# Altium PCB Controller-Board-Rev2_Panelized.PcbDoc (part 1 of 2)
Units mm, origin at the board's own origin, x right, y up, seen from the top; angles counter-clockwise.
Board outline 31 x 50 mm, 4 copper layers (Top Layer, Mid Layer 1, Mid Layer 2, Bottom Layer), stack 1.56 mm thick; 94 components, 55 nets, 446 pads, 226 vias.
Unrouted connection lines stored in the file: 54.
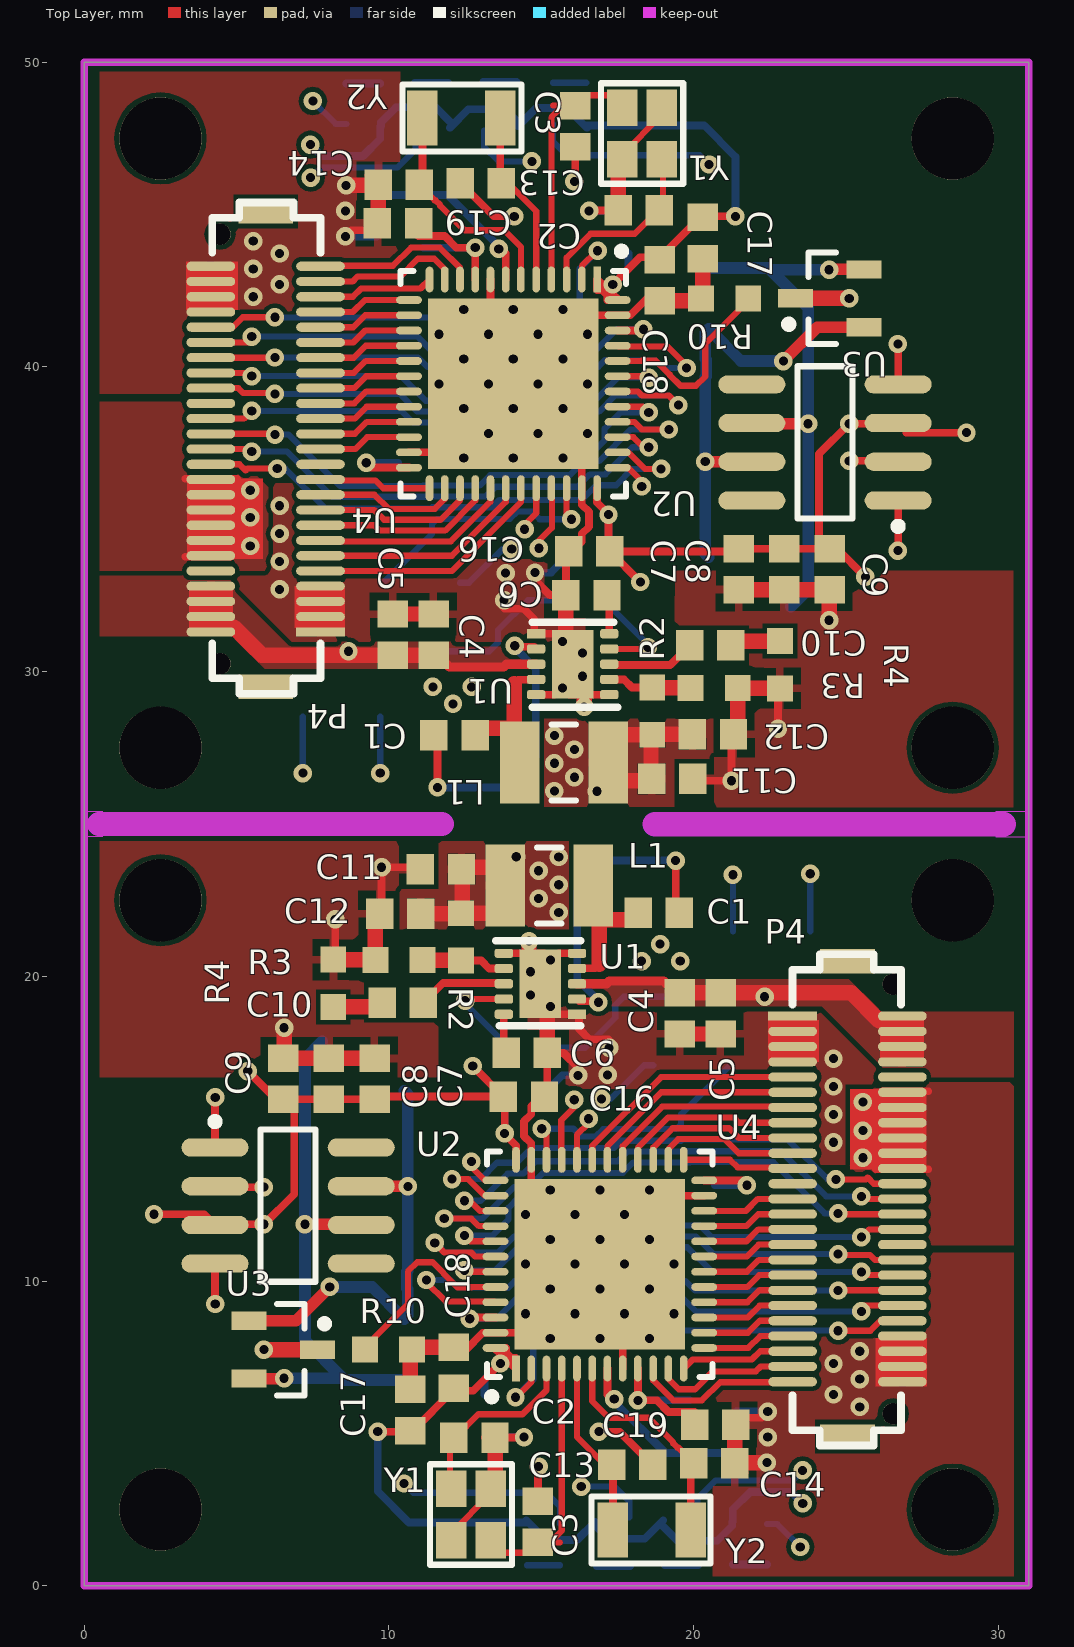
[diagram p0: Top Layer view]
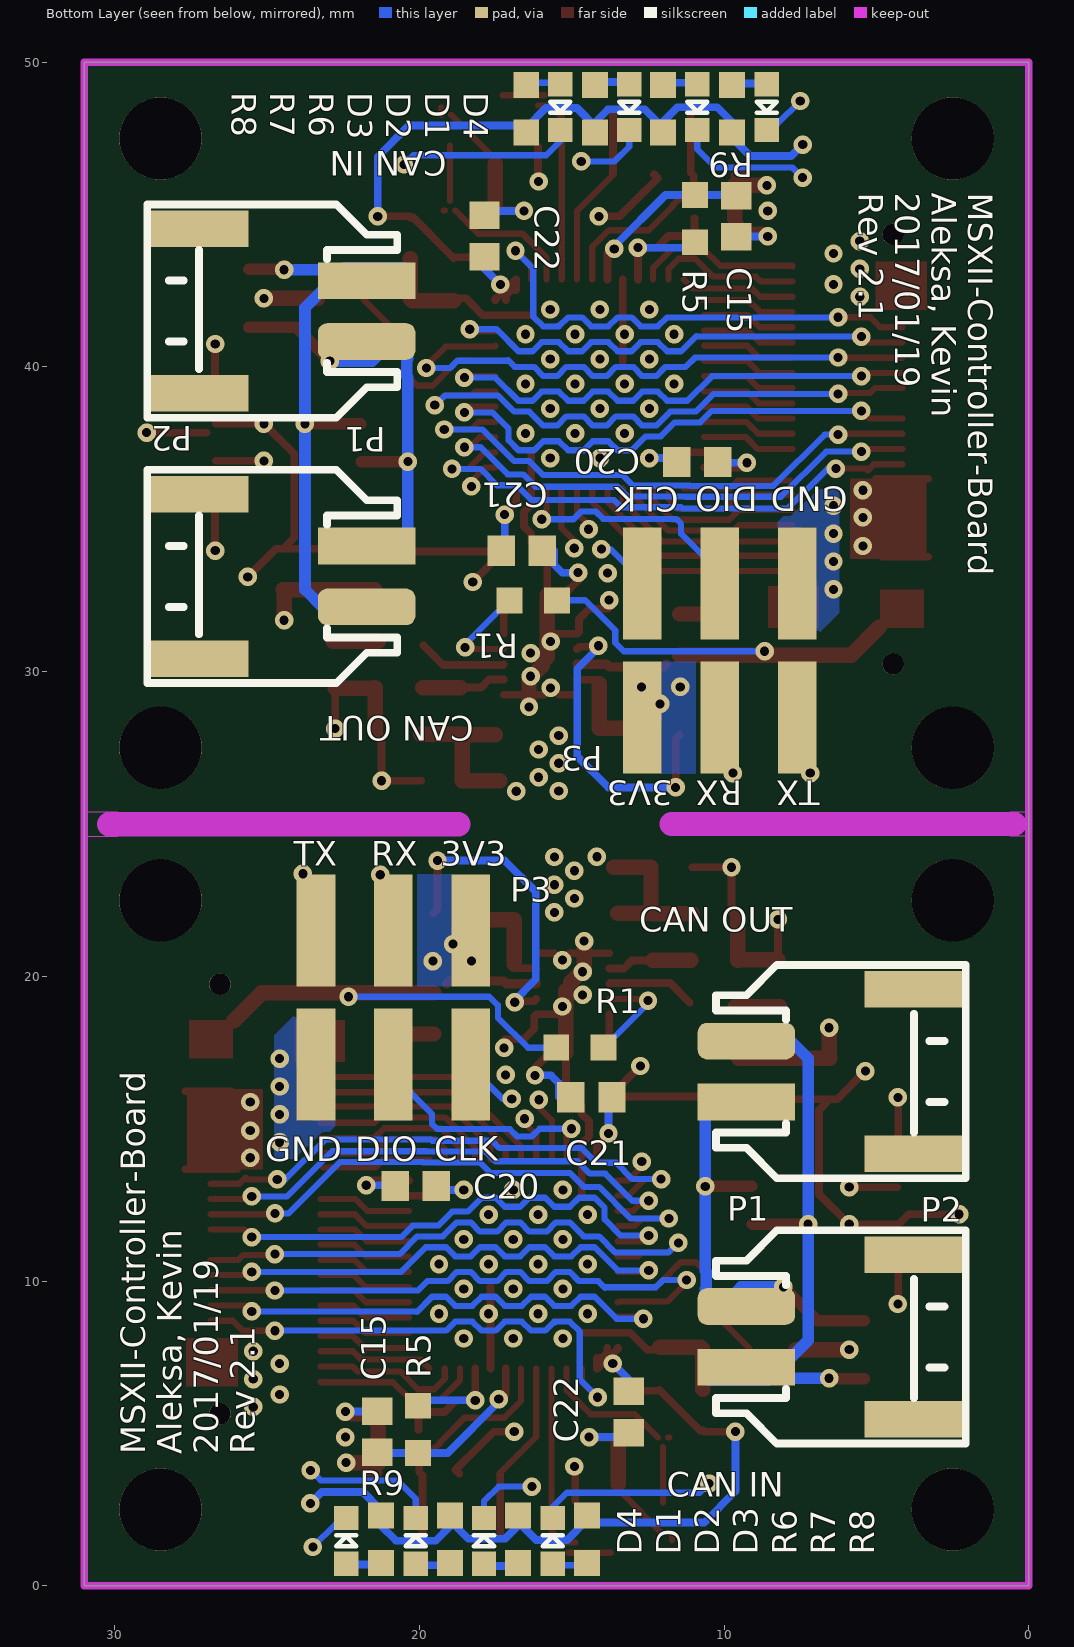
[diagram p1: Bottom Layer view, seen from below]
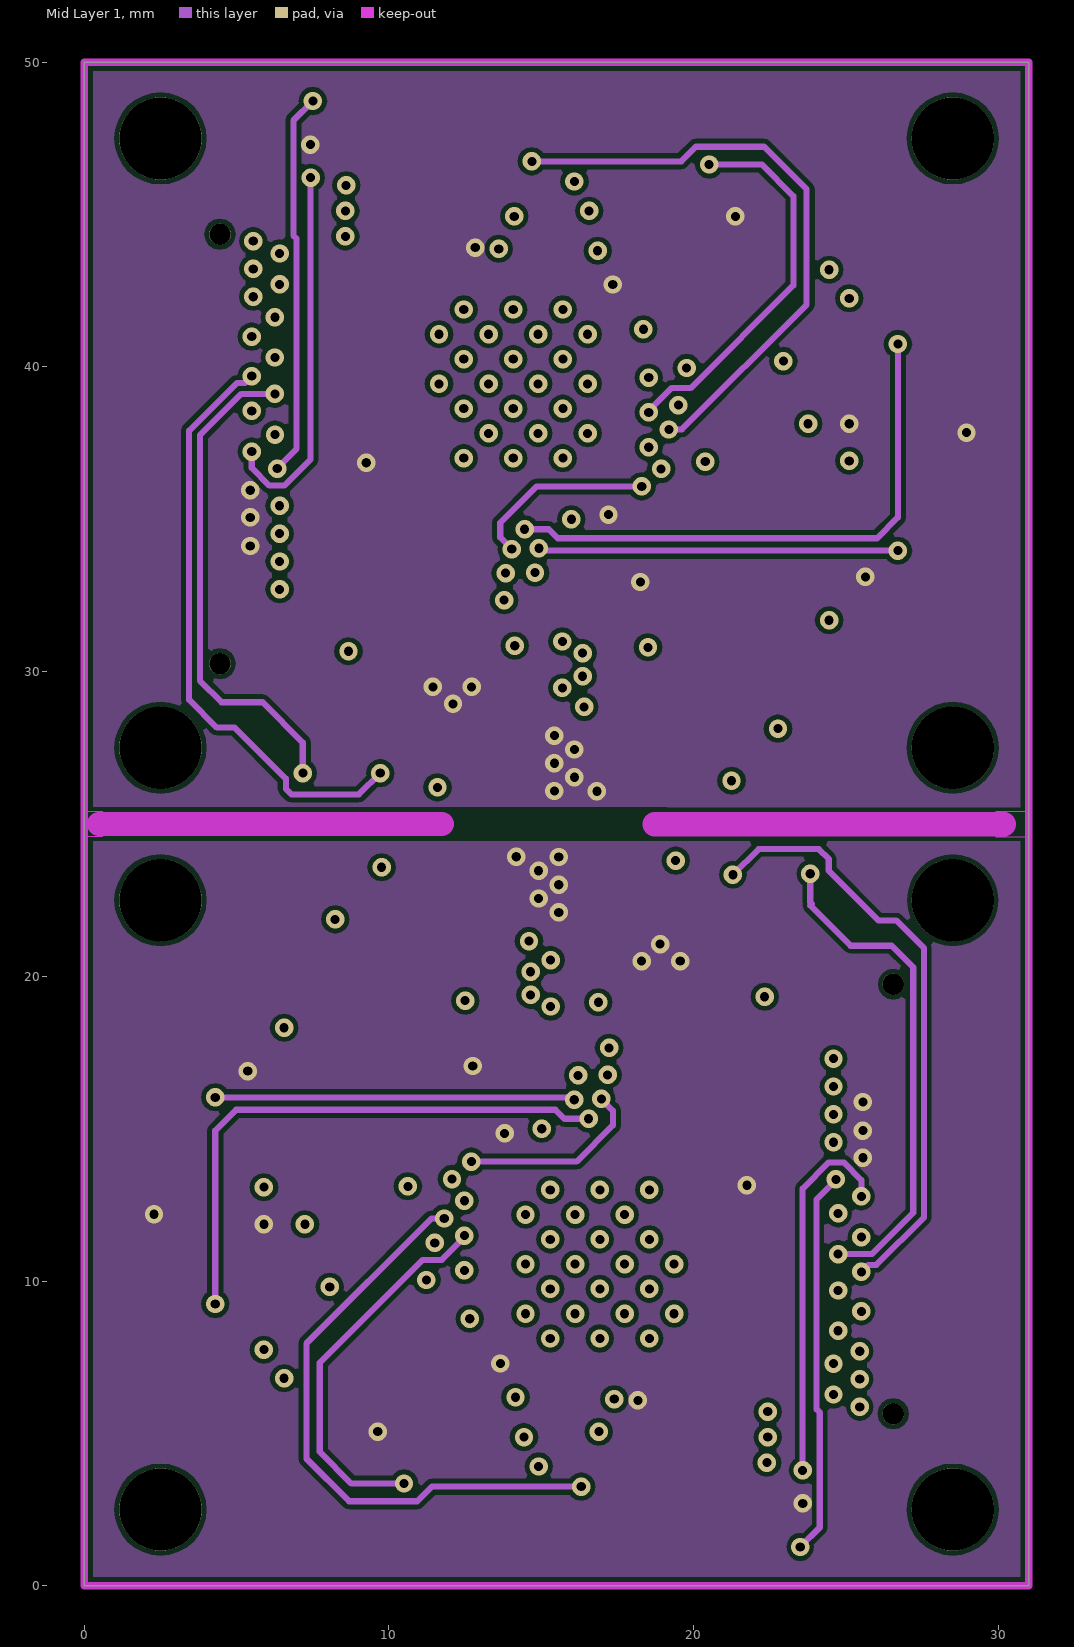
[diagram p2: Mid Layer 1]
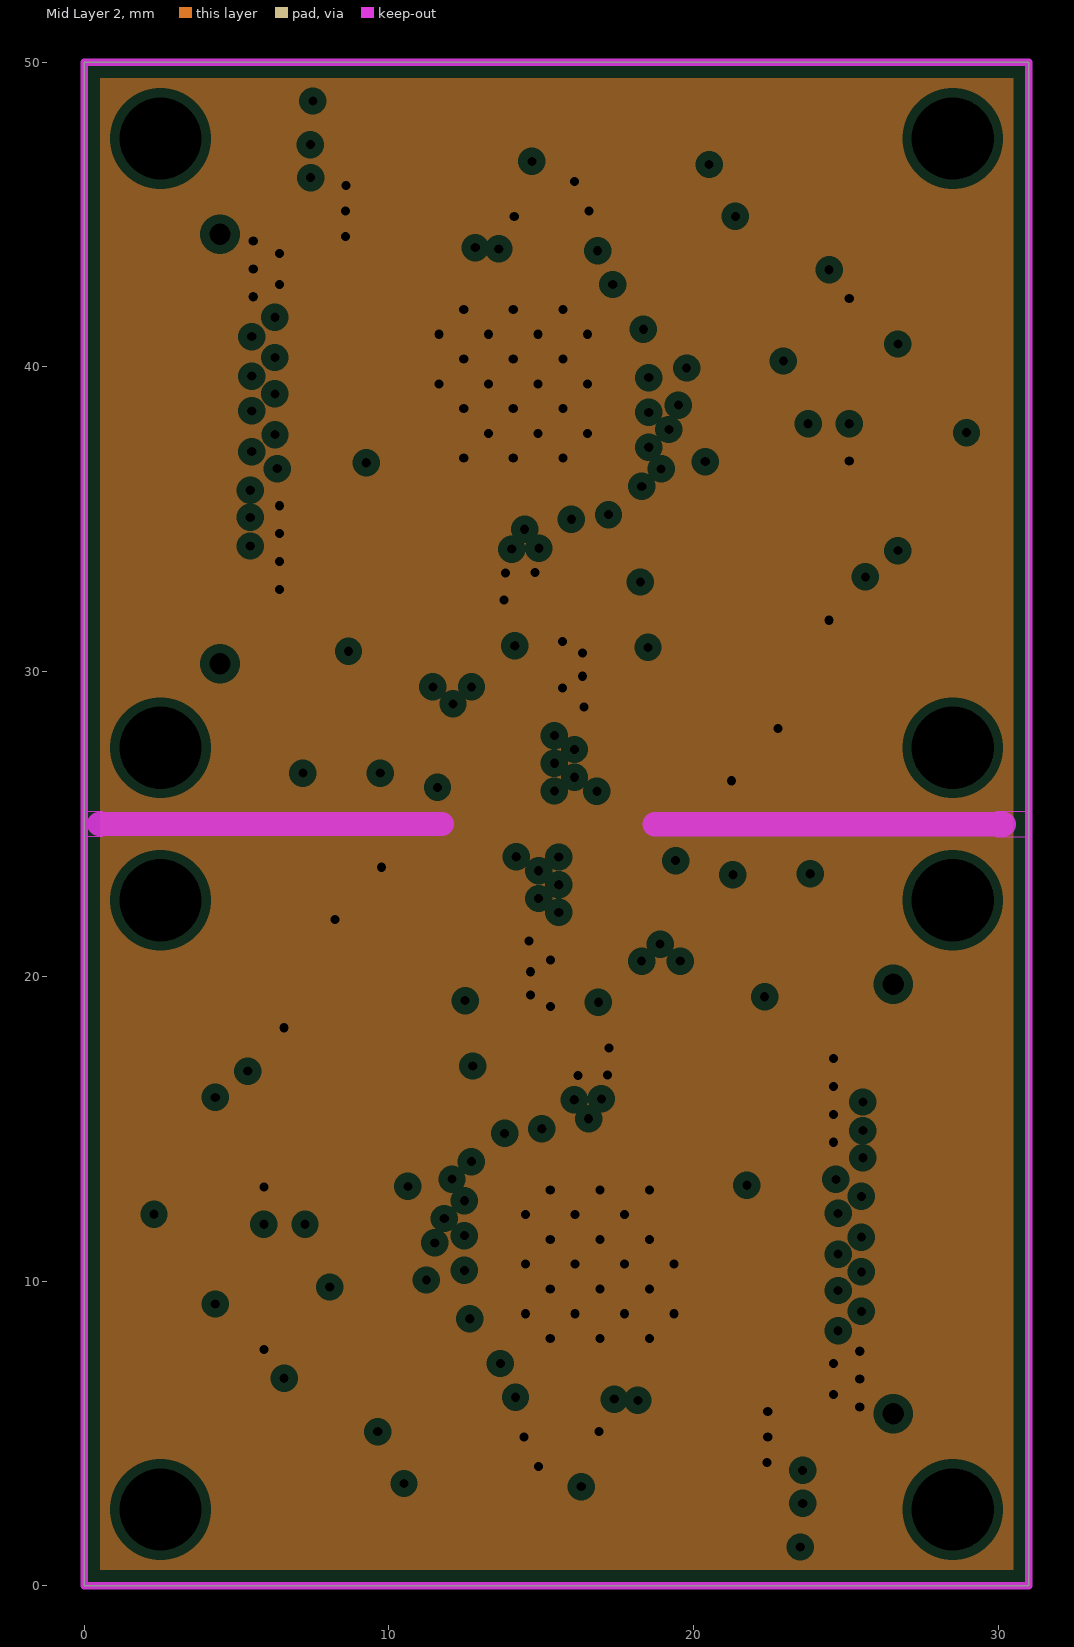
[diagram p3: Mid Layer 2, clearances drawn from the general rule]
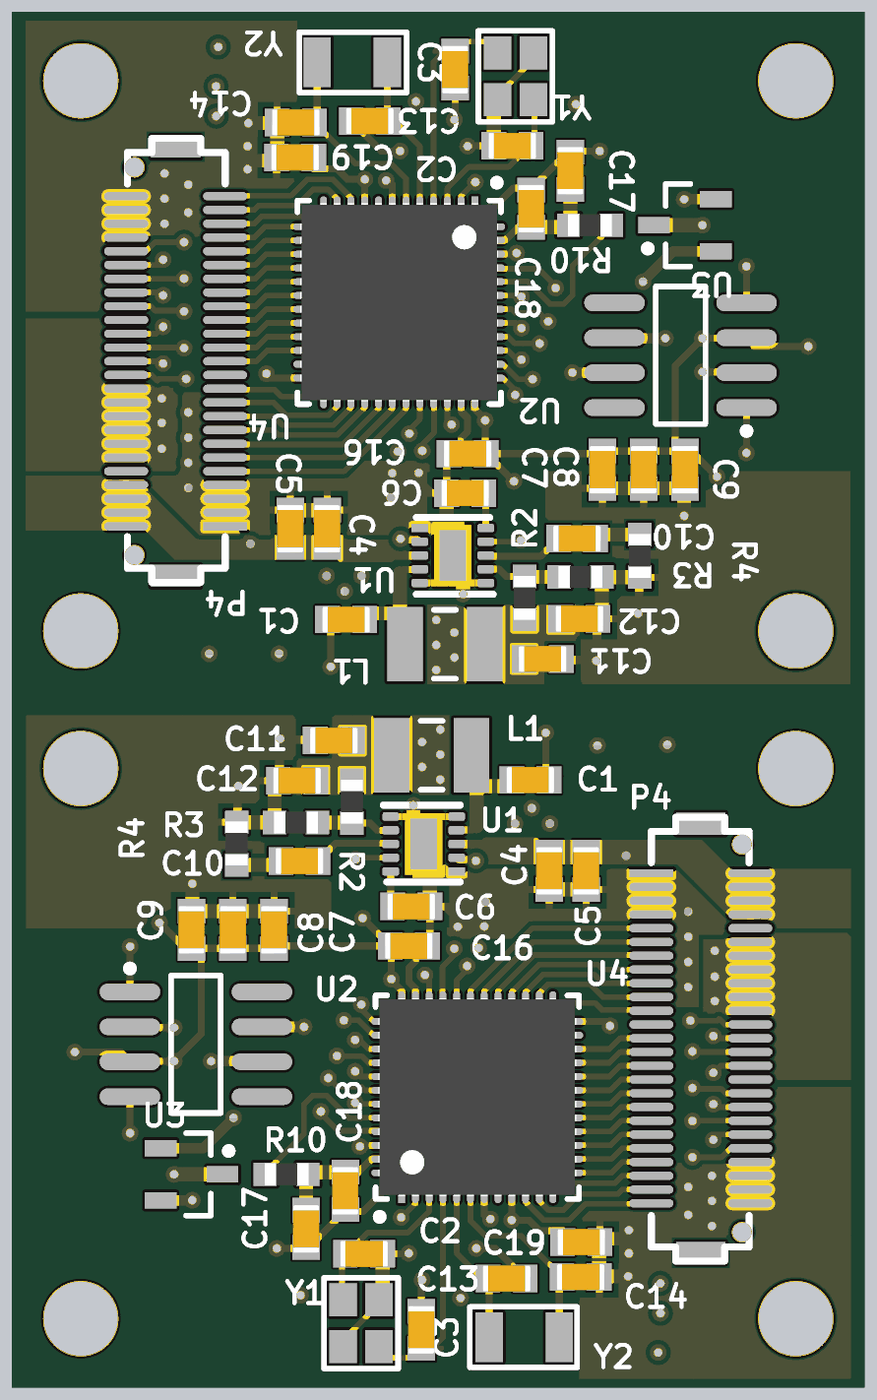
[diagram p5: 3D render of the assembled board from above, using the file's embedded part models]
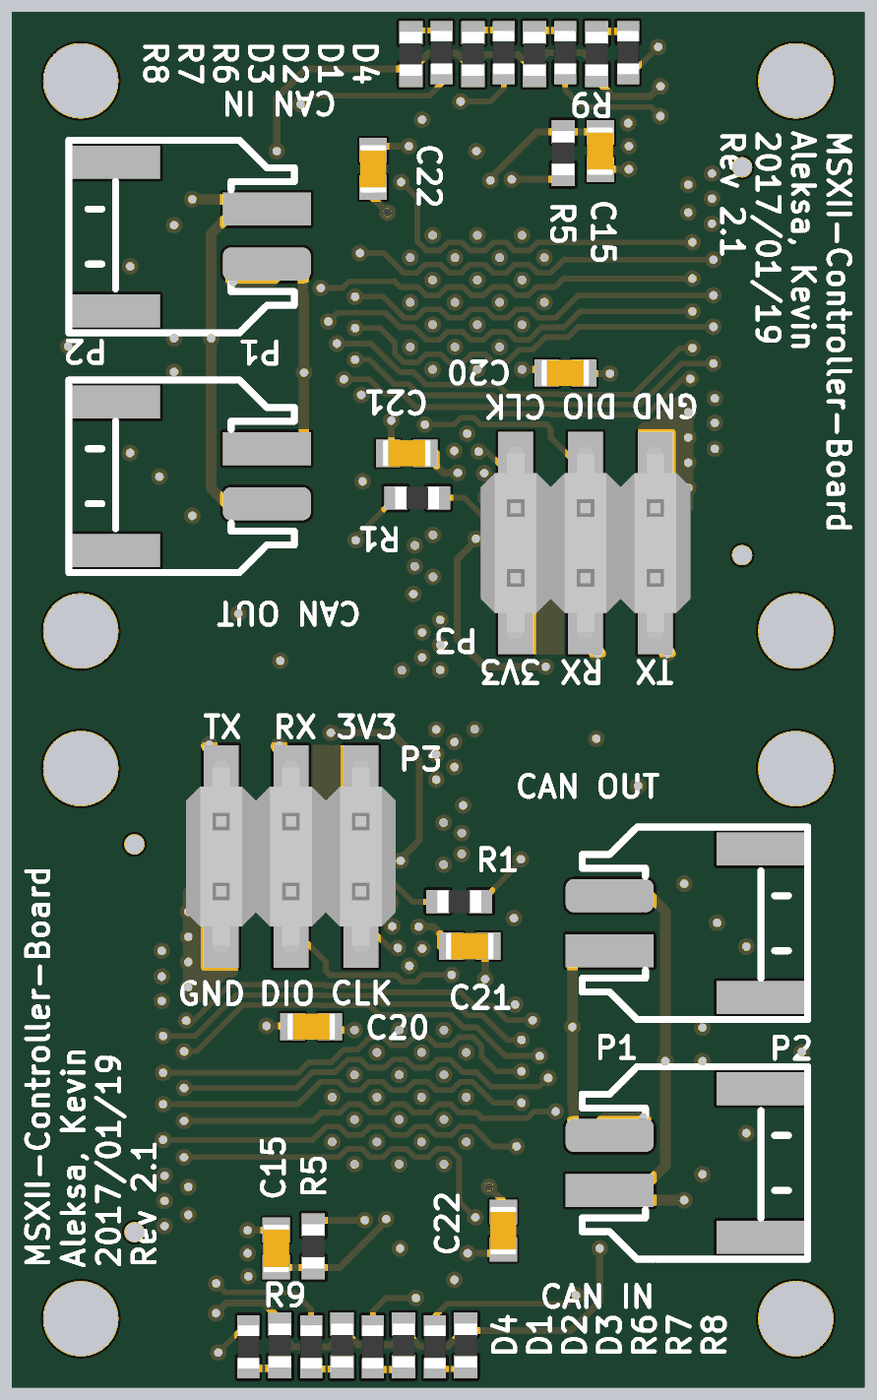
[diagram p6: 3D render of the assembled board from below, using the file's embedded part models]

## Layer stack, top to bottom
Top Solder: solder mask 0.0152, Solder Resist, Dk 3.5
Top Layer: signal copper 0.0356
Dielectric 1: prepreg 0.2007, FR-4, Dk 4.2
Mid Layer 1: signal copper 0.0356
Dielectric 3: core 1.016, FR-4, Dk 4.2
Mid Layer 2: plane copper 0.0356, net GND
Dielectric 2: prepreg 0.2007, FR-4, Dk 4.2
Bottom Layer: signal copper 0.0356
Bottom Solder: solder mask 0.0152, Solder Resist, Dk 3.5

## Board outline
0,0 31,0 31,50 0,50

## Design rules (kind name [scope] priority, off if disabled: settings)
Clearance [All] p1: gap=0.152
DiffPairsRouting [All] p1: maxlimit=0.254 minlimit=0.254 mostfreqgap=0.254 toplayer_minwidth=0.381 toplayer_maxwidth=0.381 toplayer_prefwidth=0.381 midlayer1_minwidth=0.381 midlayer1_maxwidth=0.381 midlayer1_prefwidth=0.381 bottomlayer_minwidth=0.381 bottomlayer_maxwidth=0.381 bottomlayer_prefwidth=0.381 maxuncoupledlength=12.7
PlaneClearance [All] p1: clearance=0.3
PlaneConnect [All] p1: planeconnectstyle=Direct reliefexpansion=0 reliefentries=4 reliefconductorwidth=0.254 reliefairgap=0.254
PolygonConnect PolygonConnect_12V_IN [InNet('12V_IN') vs HasFootprint('No Footprint')] p1: connectstyle=Direct reliefconductorwidth=0.254 reliefentries=4 polygonreliefangle="90 Angle" airgapwidth=0.254
PolygonConnect PolygonConnect_GND_Via [IsVia vs InNet('GND')] p2: connectstyle=Direct reliefconductorwidth=0.254 reliefentries=4 polygonreliefangle="90 Angle" airgapwidth=0.254
PolygonConnect PolygonConnect_3V3_Via [IsVia vs InNet('3V3')] p3: connectstyle=Direct reliefconductorwidth=0.254 reliefentries=4 polygonreliefangle="90 Angle" airgapwidth=0.254
PolygonConnect PolygonConnect_Capacitor_GND_Pad [InNet('GND') vs HasFootprint('CAPC1608X06N')] p4: connectstyle=Relief reliefconductorwidth=0.254 reliefentries=4 polygonreliefangle="90 Angle" airgapwidth=0.254
PolygonConnect PolygonConnect_Resistor_GND_Pad [InNet('GND') vs HasFootprint('RESC1608X06N')] p5: connectstyle=Relief reliefconductorwidth=0.254 reliefentries=4 polygonreliefangle="90 Angle" airgapwidth=0.254
RoutingVias [All] p1: holewidth=0.3 width=0.605 viastyle="Through Hole" minholewidth=0.3 minwidth=0.605 maxholewidth=6.3 maxwidth=6.605
SolderMaskExpansion [All] p1: expansion=0.102
Width [All] p1: maxlimit=1.27 minlimit=0.152 preferedwidth=0.203
27 further rules are at their usual default settings.

## Classes and differential pairs
differential pair CAN: +CAN_P -CAN_N

## Components (designator, comment, footprint, x,y, rotation, side; value= is the part's Value field where it differs from the comment)
C1 "10nF" CAPC1608X06N 12.15,27.916 r0 top
C1 "10nF" CAPC1608X06N 18.85,22.084 r180 top
C2 "8pF" CAPC1608X06N 18.195,45.137 r0 top
C2 "8pF" CAPC1608X06N 12.805,4.863 r180 top
C3 "8pF" CAPC1608X06N 16.112,47.906 r90 top
C3 "8pF" CAPC1608X06N 14.888,2.094 r270 top
C4 "10uF" CAPC1608X06N 11.464,31.218 r270 top
C4 "10uF" CAPC1608X06N 19.536,18.782 r90 top
C5 "0.1uF" CAPC1608X06N 10.118,31.218 r270 top
C5 "0.1uF" CAPC1608X06N 20.882,18.782 r90 top
C6 "0.1uF" CAPC1608X06N 16.481,32.515 r180 top
C6 "0.1uF" CAPC1608X06N 14.519,17.485 r0 top
C7 "10uF" CAPC1608X06N 21.472,33.363 r90 top
C7 "10uF" CAPC1608X06N 9.528,16.637 r270 top
C8 "4.7uF" CAPC1608X06N 22.971,33.363 r90 top
C8 "4.7uF" CAPC1608X06N 8.029,16.637 r270 top
C9 "0.1uF" CAPC1608X06N 24.469,33.363 r90 top
C9 "0.1uF" CAPC1608X06N 6.531,16.637 r270 top
C10 "6800pF" CAPC1608X06N 20.545,30.864 r180 top
C10 "6800pF" CAPC1608X06N 10.455,19.136 r0 top
C11 "22uF" CAPC1608X06N 19.296,26.483 r180 top
C11 "22uF" CAPC1608X06N 11.704,23.517 r0 top
C12 "22uF" CAPC1608X06N 20.633,27.941 r180 top
C12 "22uF" CAPC1608X06N 10.367,22.059 r0 top
C13 "8pF" CAPC1608X06N 13.013,46.038 r0 top
C13 "8pF" CAPC1608X06N 17.987,3.962 r180 top
C14 "8pF" CAPC1608X06N 10.321,45.987 r0 top
C14 "8pF" CAPC1608X06N 20.679,4.013 r180 top
C15 "0.1uF" CAPC1608X06N 9.61,44.946 r90 bottom
C15 "0.1uF" CAPC1608X06N 21.39,5.054 r270 bottom
C16 "4.7uF" CAPC1608X06N 16.57,33.947 r0 top
C16 "4.7uF" CAPC1608X06N 14.43,16.053 r180 top
C17 "4.7uF" CAPC1608X06N 20.304,44.234 r90 top
C17 "4.7uF" CAPC1608X06N 10.696,5.766 r270 top
C18 "0.1uF" CAPC1608X06N 18.881,42.851 r90 top
C18 "0.1uF" CAPC1608X06N 12.119,7.149 r270 top
C19 "0.1uF" CAPC1608X06N 10.296,44.717 r0 top
C19 "0.1uF" CAPC1608X06N 20.704,5.283 r180 top
C20 "0.1uF" CAPC1608X06N 10.88,36.882 r180 bottom
C20 "0.1uF" CAPC1608X06N 20.12,13.118 r0 bottom
C21 "0.1uF" CAPC1608X06N 16.646,33.961 r0 bottom
C21 "0.1uF" CAPC1608X06N 14.354,16.039 r180 bottom
C22 "0.1uF" CAPC1608X06N 17.865,44.299 r270 bottom
C22 "0.1uF" CAPC1608X06N 13.135,5.701 r90 bottom
D1 "Blue" DIOC1608X06N 15.379,48.527 r270 bottom
D1 "Blue" DIOC1608X06N 15.621,1.473 r90 bottom
D2 "Blue" DIOC1608X06N 13.118,48.527 r270 bottom
D2 "Blue" DIOC1608X06N 17.882,1.473 r90 bottom
D3 "Green" DIOC1608X06N 10.883,48.527 r270 bottom
D3 "Green" DIOC1608X06N 20.117,1.473 r90 bottom
D4 "Red" DIOC1608X06N 8.597,48.527 r270 bottom
D4 "Red" DIOC1608X06N 22.403,1.473 r90 bottom
L1 "10µH" 1210 15.731,27.027 r0 top
L1 "10µH" 1210 15.269,22.973 r180 top
P1 "CAN" "Dura-Clik, 2POS, 2MM, SMD, Right Angle" 21.733,42.837 r270 bottom
P1 "CAN" "Dura-Clik, 2POS, 2MM, SMD, Right Angle" 9.267,7.163 r90 bottom
P2 "CAN" "Dura-Clik, 2POS, 2MM, SMD, Right Angle" 21.733,34.125 r270 bottom
P2 "CAN" "Dura-Clik, 2POS, 2MM, SMD, Right Angle" 9.267,15.875 r90 bottom
P3 "Debug_Header" "CONN HEADER 6POS .100\" VERT TIN" 10.144,30.696 r180 bottom
P3 "Debug_Header" "CONN HEADER 6POS .100\" VERT TIN" 20.856,19.304 r0 bottom
P4 "BergStak Receptacle" 609-5227-1-ND 5.952,36.806 r180 top
P4 "BergStak Receptacle" 609-5227-1-ND 25.048,13.194 r0 top
R1 "100K" RESC1608X06N 16.265,32.336 r0 bottom
R1 "100K" RESC1608X06N 14.735,17.664 r180 bottom
R2 "26.1K" RESC1608X06N 18.64,28.705 r270 top
R2 "26.1K" RESC1608X06N 12.36,21.295 r90 top
R3 "10K" RESC1608X06N 20.672,29.467 r180 top
R3 "10K" RESC1608X06N 10.328,20.533 r0 top
R4 "6.8k" RESC1608X06N 22.831,30.229 r90 top
R4 "6.8k" RESC1608X06N 8.169,19.771 r270 top
R5 "100K" RESC1608X06N 10.956,44.87 r270 bottom
R5 "100K" RESC1608X06N 20.044,5.13 r90 bottom
R6 "40.2R" RESC1608X06N 16.497,48.476 r270 bottom
R6 "40.2R" RESC1608X06N 14.503,1.524 r90 bottom
R7 "40.2R" RESC1608X06N 14.236,48.476 r270 bottom
R7 "40.2R" RESC1608X06N 16.764,1.524 r90 bottom
R8 "86.6R" RESC1608X06N 12.001,48.476 r270 bottom
R8 "86.6R" RESC1608X06N 18.999,1.524 r90 bottom
R9 "86.6R" RESC1608X06N 9.74,48.476 r270 bottom
R9 "86.6R" RESC1608X06N 21.26,1.524 r90 bottom
R10 "510R" RESC1608X06N 21.015,42.253 r0 top
R10 "510R" RESC1608X06N 9.985,7.747 r180 top
U1 "AP65200FK-7 Buck Switching Regulator" 10-UFDFN 15.465,29.34 r270 top
U1 "AP65200FK-7 Buck Switching Regulator" 10-UFDFN 15.535,20.66 r90 top
U2 "TCAN332DR CAN Transceiver" SOIC8 24.317,37.554 r180 top
U2 "TCAN332DR CAN Transceiver" SOIC8 6.683,12.446 r0 top
U3 "TVS Diode" SOT23 24.469,42.253 r180 top
U3 "TVS Diode" SOT23 6.531,7.747 r0 top
U4 "STM32F072CBT6" QFN50P700X700X60_HS-49N 14.08,39.448 r270 top
U4 "STM32F072CBT6" QFN50P700X700X60_HS-49N 16.92,10.552 r90 top
Y1 "CRYSTAL 32 MHz 4-SMD" "CX2520DB CRYSTAL" 18.957,46.814 r90 top
Y1 "CRYSTAL 32 MHz 4-SMD" "CX2520DB CRYSTAL" 12.043,3.186 r270 top
Y2 "32.768 kHz" "ABS07AIG CRYSTAL" 13.648,48.172 r180 top
Y2 "32.768 kHz" "ABS07AIG CRYSTAL" 17.352,1.828 r0 top

## Footprints (in the part's own frame and the unit in brackets; to place one, negate y for a bottom-side part, rotate by r counter-clockwise, add the part's x,y. Pads: shape width x height; smd on the part's side, far side on the other; paste and mask are expansions set on the pad)
10-UFDFN [mm]
  rect 0.3x0.6 smd: 1(-1.905,-0.635)
  rrect50% 0.3x0.6 smd: 2(-1.405,-0.635) 3(-0.905,-0.635) 4(-0.405,-0.635) 5(0.095,-0.635) 6(0.095,1.765) 7(-0.405,1.765) 8(-0.905,1.765) 9(-1.405,1.765) 10(-1.905,1.765)
  rect 2.25x1.36 smd paste-0.2: 11(-0.905,0.565)
  silkscreen extent -2.29,-0.76 0.51,2.03
609-5227-1-ND [mm]
  rect 1.6x0.3 smd: 1(-1.8,5.5)
  oval 1.6x0.3 smd: 2(-1.8,5) 3(-1.8,4.5) 4(-1.8,4) 5(-1.8,3.5) 6(-1.8,3) 7(-1.8,2.5) 8(-1.8,2) 9(-1.8,1.5) 10(-1.8,1) 11(-1.8,0.5) 12(-1.8,0) 13(-1.8,-0.5) 14(-1.8,-1) 15(-1.8,-1.5) 16(-1.8,-2) 17(-1.8,-2.5) 18(-1.8,-3) 19(-1.8,-3.5) 20(-1.8,-4) 21(-1.8,-4.5) 22(-1.8,-5) 23(-1.8,-5.5) 24(-1.8,-6) 25(-1.8,-6.5) 26(1.8,-6.5) 27(1.8,-6) 28(1.8,-5.5) 29(1.8,-5) 30(1.8,-4.5) 31(1.8,-4) 32(1.8,-3.5) 33(1.8,-3) 34(1.8,-2.5) 35(1.8,-2) 36(1.8,-1.5) 37(1.8,-1) 38(1.8,-0.5) 39(1.8,0) 40(1.8,0.5) 41(1.8,1) 42(1.8,1.5) 43(1.8,2) 44(1.8,2.5) 45(1.8,3) 46(1.8,3.5) 47(1.8,4) 48(1.8,4.5) 49(1.8,5) 50(1.8,5.5)
  rect 1.8x0.8 smd: ""(0,7.3) ""(0,-8.3)
  round 0.7 hole 0.7: ""(1.5,6.55) ""(1.5,-7.55)
  silkscreen extent -1.8,-8.6 1.76,7.53
1210 [mm]
  rect 1.3x2.7 smd: 1(-1.441,-0.01) 2(1.459,-0.01)
  silkscreen extent -0.39,-1.26 0.41,1.24, body extent -1.69,-1.36 1.71,1.34, height 1.5
"ABS07AIG CRYSTAL" [mm]
  rect 1x1.8 smd: 1(0,0) 2(2.55,0)
  silkscreen extent -0.7,-1.1 3.2,1.1
CAPC1608X06N [mm] "Chip Capacitor, 2-Leads, Body 1.60x0.81mm, IPC Medium Density"
  rect 0.9x1 smd mask+0.076: 1(-0.675,0) 2(0.675,0)
  body extent -0.87,-0.48 0.87,0.48, height 0.9
"CONN HEADER 6POS .100\" VERT TIN" [mm] "6 Positions Header, Unshrouded, Breakaway Connector 0.100\" (2.54mm) Surface Mount Tin"
  rect 1.27x3.68 smd: 1(-2.54,2.2) 2(0,2.2) 3(2.54,2.2) 4(-2.54,-2.2) 5(0,-2.2) 6(2.54,-2.2)
  body extent -3.81,-3.49 3.81,3.49, height 9.65
"CX2520DB CRYSTAL" [mm]
  rect 1.2x1 smd: 1(0,0) 2(1.7,0) 3(1.7,1.3) 4(0,1.3)
  silkscreen extent -0.8,-0.7 2.5,2
DIOC1608X06N [mm] "Chip Diode, 2-Leads, Body 1.60x0.80mm, IPC Medium Density"
  rect 0.8x0.8 smd: 1(-0.75,0) 2(0.75,0)
  silkscreen extent -0.18,-0.33 0.18,0.33, body extent -0.8,-0.4 0.8,0.4, height 0.55
"Dura-Clik, 2POS, 2MM, SMD, Right Angle" [mm] "WM7169CT-ND"
  rect 1.2x3.2 smd: 1(0,0) ""(-1.7,-5.48) ""(3.7,-5.48)
  rrect50% 1.2x3.2 smd: 2(2,0)
  silkscreen extent -2.5,-7.2 4.5,1
QFN50P700X700X60_HS-49N [mm] "QFN, 48-Leads, Body 7.00x7.00mm, Pitch 0.50mm, Thermal Pad 5.60x5.60mm, IPC Medium Density"
  rect 0.85x0.25 smd: 1(-3.425,2.75)
  oval 0.85x0.25 smd: 2(-3.425,2.25) 3(-3.425,1.75) 4(-3.425,1.25) 5(-3.425,0.75) 6(-3.425,0.25) 7(-3.425,-0.25) 8(-3.425,-0.75) 9(-3.425,-1.25) 10(-3.425,-1.75) 11(-3.425,-2.25) 12(-3.425,-2.75) 25(3.425,-2.75) 26(3.425,-2.25) 27(3.425,-1.75) 28(3.425,-1.25) 29(3.425,-0.75) 30(3.425,-0.25) 31(3.425,0.25) 32(3.425,0.75) 33(3.425,1.25) 34(3.425,1.75) 35(3.425,2.25) 36(3.425,2.75)
  oval 0.25x0.85 smd: 13(-2.75,-3.425) 14(-2.25,-3.425) 15(-1.75,-3.425) 16(-1.25,-3.425) 17(-0.75,-3.425) 18(-0.25,-3.425) 19(0.25,-3.425) 20(0.75,-3.425) 21(1.25,-3.425) 22(1.75,-3.425) 23(2.25,-3.425) 24(2.75,-3.425) 37(2.75,3.425) 38(2.25,3.425) 39(1.75,3.425) 40(1.25,3.425) 41(0.75,3.425) 42(0.25,3.425) 43(-0.25,3.425) 44(-0.75,3.425) 45(-1.25,3.425) 46(-1.75,3.425) 47(-2.25,3.425) 48(-2.75,3.425)
  rect 5.6x5.6 smd: ""(0,0)
  silkscreen extent -4.47,-3.7 3.7,3.7, body extent -3.6,-3.6 3.6,3.6, height 0.6
RESC1608X06N [mm] "Chip Resistor, 2-Leads, Body 1.60x0.80mm, IPC Medium Density"
  rect 0.85x0.85 smd: 1(-0.775,0) 2(0.775,0)
  body extent -0.8,-0.4 0.8,0.4, height 0.55
SOIC8 [mm]
  oval 2.2x0.6 smd: 1(-2.394,1.935) 2(-2.394,0.665) 3(-2.394,-0.605) 4(-2.394,-1.875) 5(2.406,-1.875) 6(2.406,-0.605) 7(2.406,0.665) 8(2.406,1.935)
  silkscreen extent -2.52,-2.47 0.91,2.91, body extent -1.99,-2.47 2.01,2.53, height 1.75
SOT23 [mm]
  rect 1.15x0.6 smd: 1(1.125,0) 2(-1.125,-0.95) 3(-1.125,0.95)
  silkscreen extent -0.2,-1.5 1.47,1.5, body extent -0.7,-1.5 0.7,1.5, height 1.1

## Part data
C1 C1: library part "CAP CER 10nF 50V 5% X7R 0603", "10000pF ±5% 50V Ceramic Capacitor U2J 0603 (1608 Metric)"
C2 C2 C3 C3 C13 C13 C14 C14: library part "CAP CER 8PF 50V NP0 0603", "8pF ±0.5pF 50V Ceramic Capacitor C0G, NP0 0603 (1608 Metric)"
C4 C4 C7 C7: library part "CAP CER 10uF 25V 20% X5R 0603", "10µF ±20% 25V Ceramic Capacitor X5R 0603 (1608 Metric)"
C5 C5 C6 C6 C9 C9 C15 C15 C18 C18 C19 C19 C20 C20 C21 C21 C22 C22: library part "CAP CER 0.1UF 50V 10% X7R 0603", "0.10µF ±10% 50V Ceramic Capacitor X7R 0603 (1608 Metric)"
C8 C8 C16 C16 C17 C17: library part "CAP CER 4.7UF 25V 10% X5R 0603", "4.7µF ±10% 25V Ceramic Capacitor X5R 0603 (1608 Metric)"
C10 C10: library part "CAP CER 6800pF 50V 10% X7R 0603", "6800pF ±10% 50V Ceramic Capacitor X7R 0603 (1608 Metric)"
C11 C11 C12 C12: library part "CAP CER 22uF 25V 20% X5R 0603", "0.22µF ±20% 25V Ceramic Capacitor X5R 0603 (1608 Metric)"
D1 D1 D2 D2: library part LED_BLUE, "LED BLUE CLEAR 0603 SMD"
D3 D3: library part LED_GREEN, "LED GREEN CLEAR 0603 SMD"
D4 D4: library part LED_RED, "Red LED 0603"
L1 L1: library part "IND 10UH POWDERED IRON 0.9A", "10µH Shielded Wirewound Inductor 900mA 420 mOhm Max 1210 (3225 Metric)"
P1 P1 P2 P2: library part "2 Position DuraClik CAN Connector", "2 Positions Header, Shrouded Connector 0.079\" (2.00mm) Surface Mount, Right Angle Tin"
P3 P3: library part "CONN HEADER 6POS .100 STR TIN", "6 Positions Header, Unshrouded, Breakaway Connector 0.100\" (2.54mm) Surface Mount Tin"
P4 P4: library part "BergStak 50 Position Connector Receptacle", "50 Position Connector Receptacle, Center Strip Contacts Surface Mount Gold"
R1 R1 R5 R5: library part "RES 100K OHM 1/8W 5% 0603 SMD", "RES SMD 100K OHM 5% 1/10W 0603"
R2 R2: library part "RES 26.1K OHM 1/10W 1% 0603 SMD", "RES SMD 26.1K OHM 1% 1/10W 0603"
R3 R3: library part "RES SMD 10K OHM 1% 1/10W 0603", "RES SMD 10K OHM 1% 1/10W 0603"
R4 R4: library part "RES 6.8k OHM 1% 1/10W 0603 SMD", "RES SMD 6.8K OHM 1% 1/10W 0603"
R6 R6 R7 R7: library part "RES 40.2 OHM 0.5% 1/10W 0603 SMD", "RES SMD 40.2 OHM 0.5% 1/10W 0603"
R8 R8 R9 R9: library part "RES 86.6 OHM 1% 1/10W 0603 SMD", "RES SMD 86.6 OHM 1% 1/10W 0603"
R10 R10: library part "RES 510 OHM 1/10W 0603 SMD", "RES SMD 510 OHM 5% 1/10W 0603"
U1 U1: "Buck Switching Reg IC Positive Adjustable 0.925V 1 Output 2A 10-UFDFN Exposed Pad"
U2 U2: "1/1 Transceiver CAN 8-SOIC"
Y1 Y1: "32MHz ±15ppm Crystal 8pF 50 Ohm -40°C ~ 85°C AEC-Q200 Surface Mount 4-SMD, No Lead"
Y2 Y2: library part "CRYSTAL 32.768KHZ 9PF 2-SMD", "32.768kHz ±20ppm Crystal 6pF 50 kOhm -40°C ~ 85°C Surface Mount 4-SOJ, 5.50mm pitch"

## Free pads (board coordinates)
  round 2.7 hole 2.7: ""(2.5,2.5) ""(2.5,22.5) ""(2.5,27.5) ""(2.5,47.5) ""(28.5,2.5) ""(28.5,22.5) ""(28.5,27.5) ""(28.5,47.5)

## Via types
v1: diameter 0.605, hole 0.3, Top Layer to Bottom Layer, tented both sides, 174 vias
v2: diameter 0.605, hole 0.3, Top Layer to Bottom Layer, tented bottom, 52 vias

## Nets (pads, with @x,y where several pads share a name; then routed paths per layer and width w, separated by ;. In a path a pad name is that pad's centre, name@x,y a point inside that pad or via, vN(x,y) a via of type N, cw(c..) or ccw(c..) an arc to the next point about the centre after c; other vN are vias at no path point)
3V3: C7.2 C8.2 C9.2 C11.2 C12.2 C16.2 C17.2 C18.2 C19.2 C20.2 C21.2 C22.2 L1.2 P3.4 P4.40 P4.41 P4.42 P4.43 P4.44 P4.45 R2.2 R5.2 R6.2 R7.2 R8.2 R9.2 U2.3 U4.1 U4.9 U4.24 U4.36 U4.48 | length 129.1
  Top Layer w0.254: v1(2.286,12.192) 3.938,12.192 U2.3@4.268,11.862 ; 3.311,33.769 P4.45@4.81,33.769 ; 3.311,36.335 5.013,36.335 ; U2.3@4.31,11.862 v1(5.896,11.862) 6.886,12.852 6.886,15.606 C9.2@6.531,15.962 ; v1(5.362,16.891) 6.291,15.962 C9.2@6.531,15.962 ; v1@9.413,36.698 U4.24@10.655,36.698 ; v1(9.629,5.055) C17.2@10.661,5.055 ; C17.2@10.696,5.091 10.787,5.091 C18.2@12.094,6.398 ; C19.2@10.971,44.883 10.971,44.299 11.825,44.299 12.206,43.918 v1(12.83,43.918) ; C18.2@12.119,6.423 C18.2@12.094,6.398 ; v1(12.75,17.058) C16.2@13.755,16.053 ; U4.9@12.83,42.873 v1@12.83,43.709 ; U4.48@13.495,7.802 13.479,7.786 13.657,7.609 v1(13.657,7.293) ; U4.48@13.837,7.801 13.84,7.797 13.84,7.637 14.004,7.473 14.165,7.473 14.17,7.468 U4.1@14.17,7.127 14.004,7.293 v1(13.657,7.293) ; U4.36@14.177,13.984 14.177,14.438 13.796,14.819 v1(13.796,14.845) 13.796,15.872 13.615,16.053 9.619,16.053 C7.2@9.528,15.962 C8.2@8.029,15.962 C9.2@6.531,15.962 ; U4.36@16.823,36.016 16.823,35.562 17.204,35.181 v1(17.204,35.155) 17.204,34.128 17.385,33.947 21.381,33.947 C7.2@21.472,34.038 C8.2@22.971,34.038 C9.2@24.469,34.038 ; U4.48@17.163,42.199 17.16,42.203 17.16,42.363 16.996,42.527 16.835,42.527 16.83,42.532 U4.1@16.83,42.873 16.996,42.707 v1(17.343,42.707) ; C16.2@17.245,33.947 v1(18.25,32.942) ; U4.48@17.505,42.198 17.521,42.214 17.343,42.391 v1(17.343,42.707) ; v1(18.17,6.082) 18.794,6.082 19.175,5.701 20.029,5.701 C19.2@20.029,5.117 ; v1@18.17,6.291 U4.9@18.17,7.127 ; C18.2@18.881,43.577 C18.2@18.906,43.602 ; C17.2@20.303,44.909 20.213,44.909 C18.2@18.906,43.602 ; C17.2@20.339,44.945 v1(21.371,44.945) ; U4.24@20.345,13.302 v1@21.587,13.302 ; v1(25.638,33.109) 24.709,34.038 C9.2@24.469,34.038 ; 25.987,13.665 27.689,13.665 ; P4.45@26.19,16.231 27.689,16.231 ; U2.3@26.69,38.138 v1(25.104,38.138) 24.114,37.148 24.114,34.394 C9.2@24.469,34.038 ; 26.982,37.846 v1(28.956,37.846) ; C18.2@12.094,6.398 12.761,6.398 v1(13.657,7.293) ; v1(17.343,42.707) 18.239,43.602 C18.2@18.906,43.602
  Top Layer w0.508: C12.2@11.042,22.059 R2.2@12.349,22.059 ; R2.2@12.36,22.07 L1.2@13.49,22.07 ; R2.2@12.4,22.11 12.4,23.581 L1.2@13.63,23.581 ; L1.2@17.37,26.419 18.6,26.419 R2.2@18.6,27.89 ; L1.2@17.51,27.93 R2.2@18.64,27.93 ; R2.2@18.651,27.941 C12.2@19.958,27.941
  Bottom Layer w0.254: v1(7.419,47.301) 7.793,46.927 9.147,46.927 9.714,47.493 R9.2@9.714,47.904 ; v1(9.254,36.857) C20.2@10.306,36.857 ; v1(9.629,5.055) 9.629,3.099 10.658,2.07 R6.2@14.506,2.07 ; R9.2@9.737,47.904 9.737,48.032 10.232,48.527 11.529,48.527 R8.2@11.998,48.058 ; R5.2@11.133,43.918 v1(12.83,43.918) ; R8.2@12.001,47.854 12.603,48.456 13.809,48.456 R7.2@14.233,48.032 ; C22.2@13.135,6.274 13.135,6.772 v1(13.657,7.293) ; C21.2@13.629,16.039 13.796,15.872 v1(13.796,14.845) ; R7.2@14.233,47.904 14.83,48.501 15.85,48.501 R6.2@16.497,47.854 ; R6.2@14.503,2.146 15.15,1.499 16.17,1.499 R7.2@16.767,2.096 ; R6.2@16.494,47.93 20.342,47.93 21.371,46.901 v1(21.371,44.945) ; R7.2@16.767,1.968 17.191,1.544 18.397,1.544 R8.2@18.999,2.146 ; v1(17.204,35.155) 17.204,34.128 C21.2@17.371,33.961 ; v1(17.343,42.707) 17.865,43.228 C22.2@17.865,43.726 ; v1(18.17,6.082) R5.2@19.867,6.082 ; R8.2@19.002,1.942 19.471,1.473 20.768,1.473 21.263,1.968 R9.2@21.263,2.096 ; C20.2@20.694,13.143 v1(21.746,13.143) ; R9.2@21.286,2.096 21.286,2.507 21.853,3.073 23.207,3.073 v1(23.581,2.699)
  other v1: 25.555,14.046 25.555,14.935 25.555,15.875 18.291,20.498 19.561,20.498 18.9,21.057 15.573,22.098 14.913,22.555 15.573,23.008 14.913,23.465 15.573,23.917 14.176,23.927 15.427,26.083 16.824,26.073 16.087,26.535 15.427,26.992 16.087,27.445 15.427,27.902 12.1,28.943 11.439,29.502 12.709,29.502 5.445,34.125 5.445,35.065 5.445,35.954
12V_IN: C4.2 C5.2 P4.47 P4.48 P4.49 P4.50 R1.1 U1.3 | length 35.4
  Top Layer w0.305: C4.2@11.896,30.245 11.985,30.156 13.77,30.156 13.859,30.245 U1.3@14.83,30.245 ; U1.3@16.17,19.755 17.141,19.755 17.23,19.844 19.015,19.844 C4.2@19.104,19.755
  Top Layer w0.508: 4.911,31.457 5.825,30.543 C5.2@10.118,30.543 C4.2@11.464,30.543 ; C4.2@19.536,19.457 C5.2@20.882,19.457 25.175,19.457 26.089,18.543
  Bottom Layer w0.203: v1(8.671,30.671) 13.293,30.671 13.573,30.951 13.573,31.357 14.563,32.347 15.478,32.347 R1.1@15.49,32.336 ; R1.1@15.51,17.664 15.522,17.653 16.437,17.653 17.427,18.643 17.427,19.049 17.707,19.329 v1(22.329,19.329)
BOOT0: R10.2 U4.44 | length 13
  Top Layer w0.203: R10.2@9.172,7.785 10.62,9.233 10.62,10.312 10.925,10.617 11.432,10.617 11.786,10.263 11.786,10.251 12.244,9.793 12.705,9.793 12.715,9.802 U4.44@13.495,9.802 ; U4.44@17.505,40.198 18.285,40.198 18.295,40.207 18.756,40.207 19.214,39.749 19.214,39.737 19.568,39.383 20.075,39.383 20.38,39.688 20.38,40.767 R10.2@21.828,42.215
BST: C1.1 U1.2 | length 21
  Top Layer w0.254: C1.1@11.464,27.927 11.592,27.799 v1(11.592,26.2) ; v1@14.055,30.874 14.129,30.948 v1(14.129,30.852) ; v1@14.215,30.815 14.759,30.815 U1.2@14.83,30.745 ; U1.2@16.17,19.255 16.241,19.185 v1@16.785,19.185 ; v1(16.871,19.148) 16.871,19.052 v1@16.945,19.126 ; v1(19.408,23.8) 19.408,22.201 C1.1@19.536,22.073
  Bottom Layer w0.254: v1(11.592,26.2) 13.801,26.2 14.817,27.216 14.817,30.099 v1@14.055,30.861 ; v1@14.068,30.848 14.081,30.861 14.055,30.887 14.119,30.95 14.129,30.939 v1(14.129,30.852) ; v1(16.871,19.148) 16.871,19.061 16.881,19.05 16.945,19.113 16.919,19.139 v1@16.932,19.152 ; v1@16.945,19.139 16.183,19.901 16.183,22.784 17.199,23.8 v1(19.408,23.8)
CAN_N: P1.1 P2.2 U2.6 U3.2 | length 37.5
  Top Layer w0.381: U3.2@5.406,6.797 v1@6.556,6.797 ; v1(7.242,11.862) U2.6@9.068,11.862 ; U2.6@21.932,38.138 v1(23.758,38.138) ; v1@24.444,43.203 U3.2@25.594,43.203
  Bottom Layer w0.381: v1(6.556,6.807) P1.1@8.486,6.807 ; P2.2@7.813,17.875 7.242,17.304 v1(7.242,11.862) 7.242,8.052 P1.1@8.486,6.807 ; P1.1@10.5,6.75 8.544,6.75 P1.1@8.486,6.807 ; P1.1@20.5,43.25 22.456,43.25 P1.1@22.514,43.193 ; P2.2@23.187,32.125 23.758,32.696 v1(23.758,38.138) 23.758,41.948 P1.1@22.514,43.193 ; v1(24.444,43.193) P1.1@22.514,43.193
CAN_P: P1.2 P2.1 U2.7 U3.3 | length 30.3
  Top Layer w0.381: U3.3@5.406,8.697 6.947,8.697 v1(8.055,9.804) ; U2.7@9.094,13.106 v1(10.62,13.106) ; v1(20.38,36.894) U2.7@21.906,36.894 ; v1(22.945,40.196) 24.053,41.303 U3.3@25.594,41.303
  Bottom Layer w0.381: v1(8.055,9.804) 9.446,9.804 P1.2@10.487,8.763 ; P1.2@10.5,8.75 10.62,8.87 10.62,9.73 10.584,9.766 10.584,10.3 10.62,10.336 v1(10.62,13.106) 10.62,16.13 P2.1@10.5,16.25 ; P2.1@20.5,33.75 20.38,33.87 v1(20.38,36.894) 20.38,39.664 20.416,39.7 20.416,40.234 20.38,40.27 20.38,41.13 P1.2@20.5,41.25 ; P1.2@20.513,41.237 21.554,40.196 v1(22.945,40.196)
COMP: C10.2 U1.8 | length 5.8
  Top Layer w0.254: C10.2@11.13,19.136 11.778,19.784 13.741,19.784 U1.8@13.77,19.755 ; U1.8@17.23,30.245 17.259,30.216 19.222,30.216 C10.2@19.87,30.864
EN: R1.2 U1.9 | length 6.9
  Top Layer w0.203: v1(12.5,19.202) 12.552,19.255 U1.9@13.77,19.255 ; U1.9@17.23,30.745 18.448,30.745 v1(18.5,30.798)
  Bottom Layer w0.203: v1(12.5,19.202) 12.5,19.102 R1.2@13.949,17.653 ; R1.2@17.051,32.347 18.5,30.898 v1(18.5,30.798)
FB: R2.1 R3.2 U1.7 | length 5.5
  Top Layer w0.254: R2.1@12.36,20.52 13.024,20.52 13.289,20.255 U1.7@13.77,20.255 ; U1.7@17.23,29.745 17.711,29.745 17.976,29.48 R2.1@18.64,29.48
  Top Layer w0.508: R3.2@11.103,20.533 R2.1@12.347,20.533 ; R2.1@18.653,29.467 R3.2@19.897,29.467